# Altium PCB PCB1.PcbDoc
Units mm, origin at the board's own origin, x right, y up, seen from the top; angles counter-clockwise.
Board outline 366.78 x 253.36 mm, 2 copper layers (Top Layer, Bottom Layer); 82 components, 38 nets, 184 pads, 0 vias.
Unrouted connection lines stored in the file: 34.
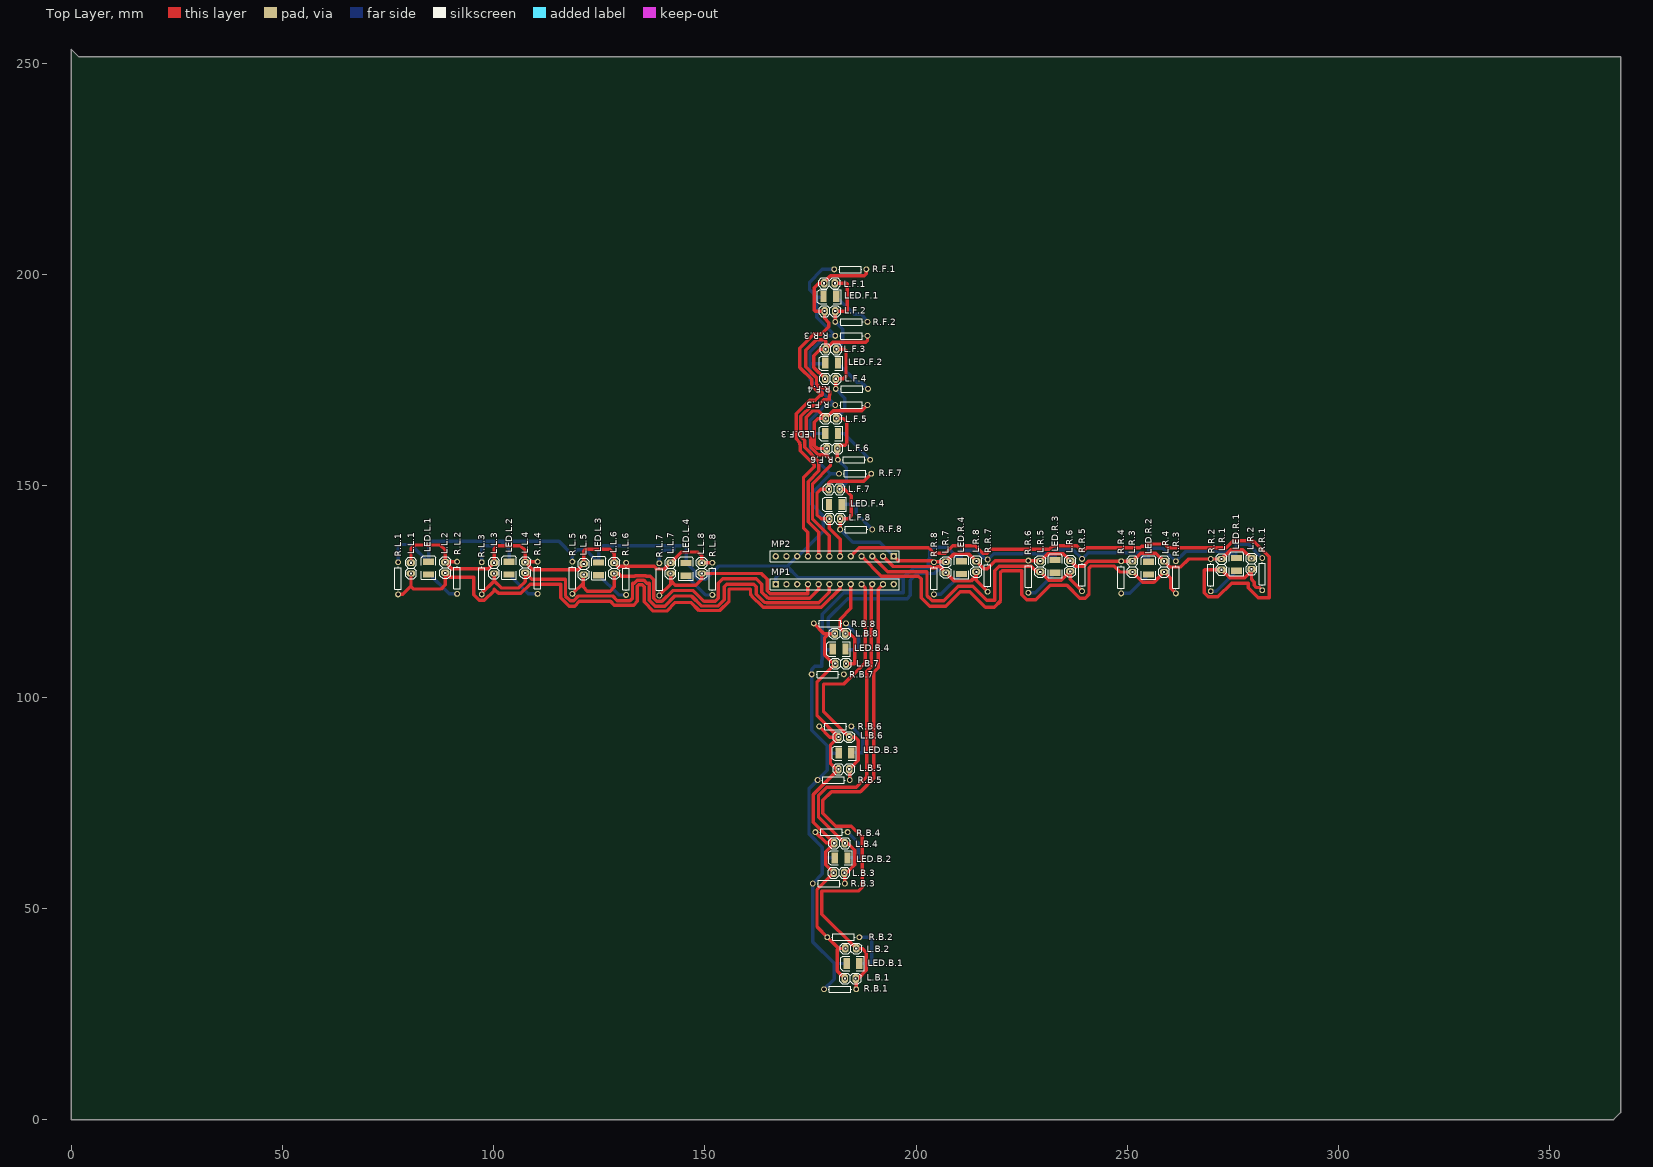
[diagram p0: Top Layer view]
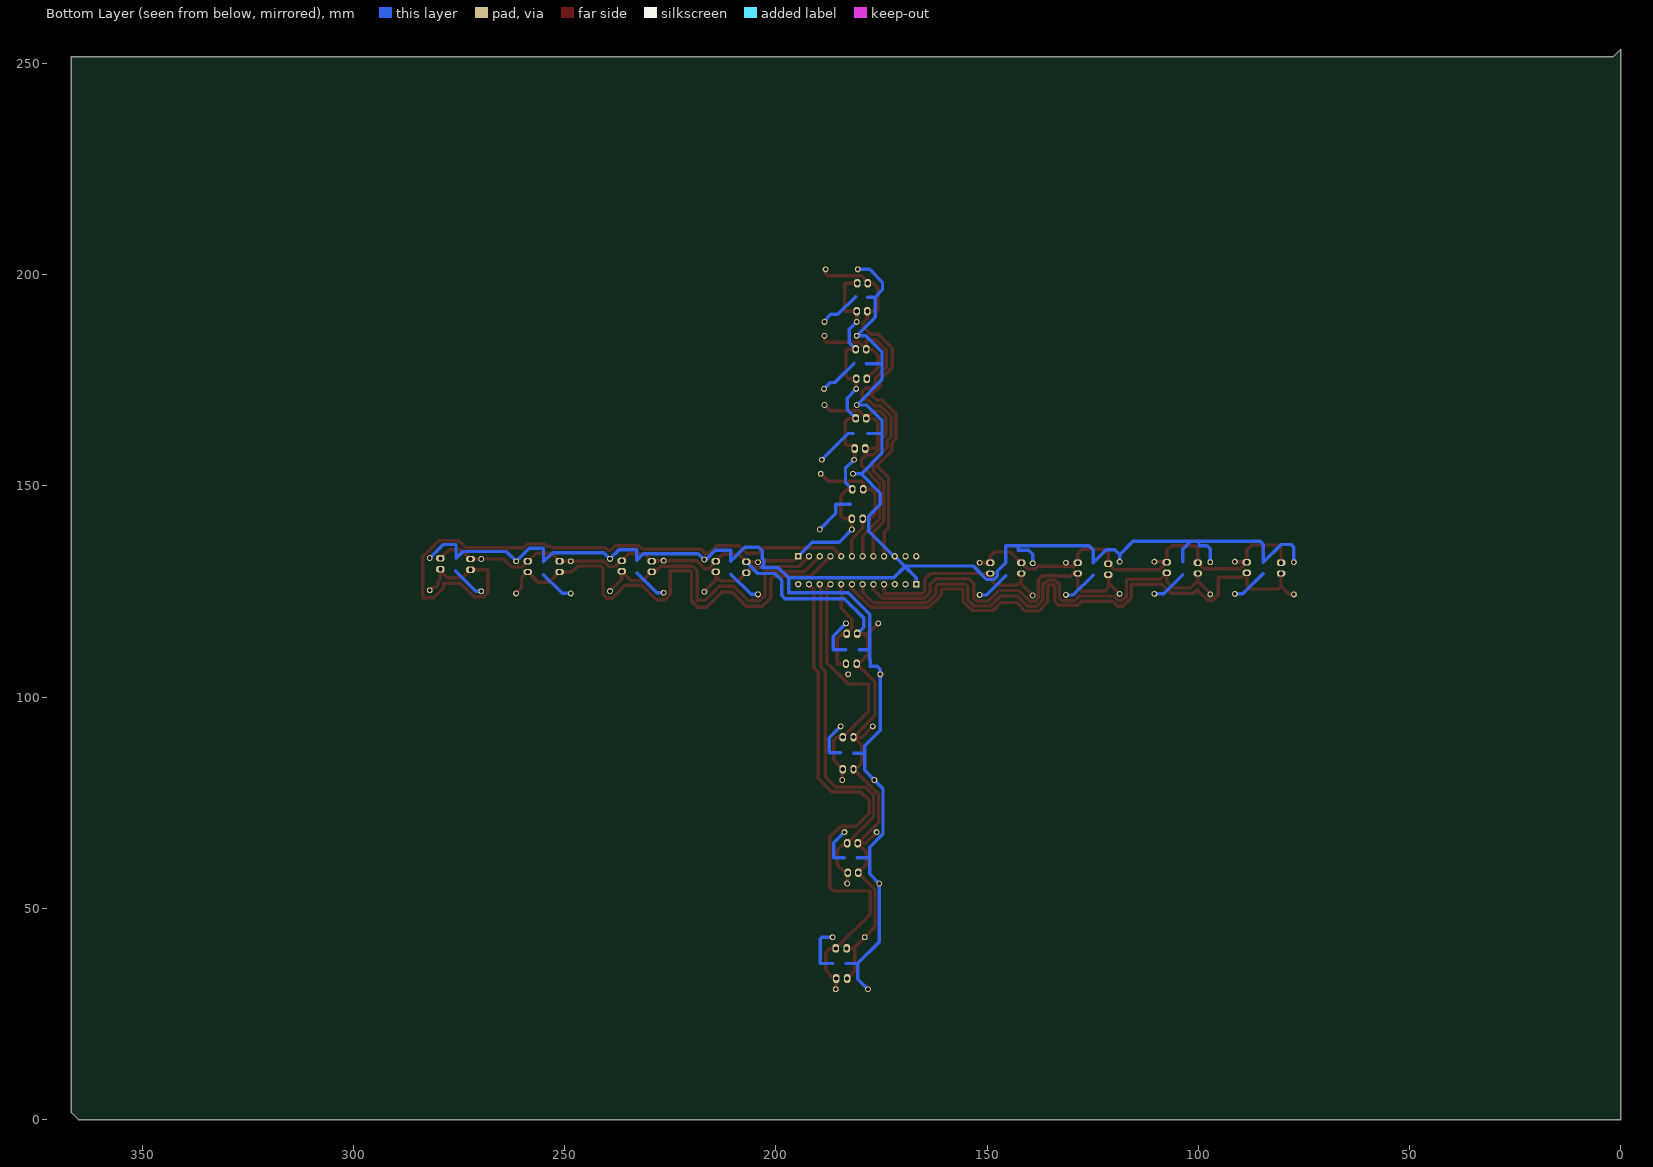
[diagram p1: Bottom Layer view, seen from below]
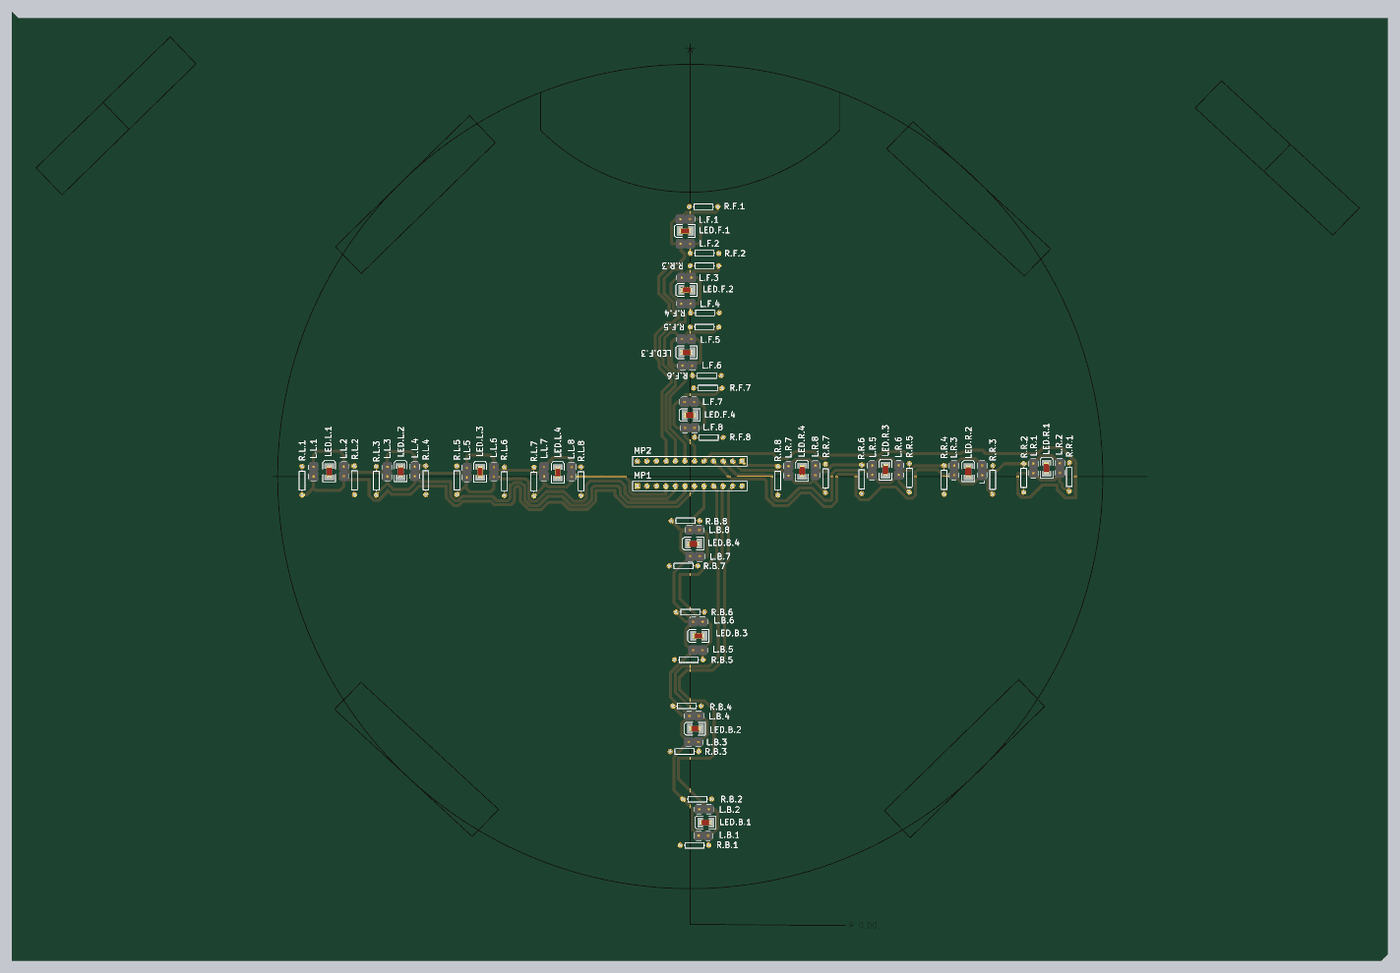
[diagram p2: 3D render of the assembled board from above, using the file's embedded part models]

## Layer stack, top to bottom
Top Solder: solder mask 0.0102, Solder Resist, Dk 3.5
Top Layer: signal copper 0.0356
Dielectric 1: dielectric 0.32, FR-4, Dk 4.8
Bottom Layer: signal copper 0.0356
Bottom Solder: solder mask 0.0102, Solder Resist, Dk 3.5

## Board outline
0,0 365.125,0 366.776,1.651 366.776,251.587 1.778,251.587 0,253.365

## Design rules (kind name [scope] priority, off if disabled: settings)
Clearance Clearance_2 [All] p1: gap=0.254 ignorepadtopadclearanceinfootprint=FALSE except(0: Arc-Hole Track-Hole SMDPad-Hole THPad-Hole Via-Hole Fill-Hole Poly-Hole Region-Hole Text-Hole)
Clearance Clearance_1 [All] p2: gap=0.254 ignorepadtopadclearanceinfootprint=FALSE except(0: Arc-Hole Track-Hole SMDPad-Hole THPad-Hole Via-Hole Fill-Hole Poly-Hole Region-Hole Text-Hole)
Clearance [All] p3: gap=0.254 ignorepadtopadclearanceinfootprint=FALSE except(0: Arc-Hole Track-Hole SMDPad-Hole THPad-Hole Via-Hole Fill-Hole Poly-Hole Region-Hole Text-Hole)
PolygonConnect [All] p1: connectstyle=Relief reliefconductorwidth=0.254 reliefentries=4 polygonreliefangle="90 Angle" airgapwidth=0.254
RoutingVias [All] p1: holewidth=0.711 width=1.27 viastyle="Through Hole" minholewidth=0.711 minwidth=1.27 maxholewidth=0.711 maxwidth=1.27
SolderMaskExpansion [All] p1: expansion=0.102
Width Width_1 [All] p1: maxlimit=1 minlimit=0.8 preferedwidth=0.8 minimp=50.000000 maximp=50.000000 favimp=50.000000
30 further rules are at their usual default settings.

## Components (designator, comment, footprint, x,y, rotation, side; value= is the part's Value field where it differs from the comment)
L.B.1 "Header 2" My_1X02 183.134,33.401 r180 top
L.B.2 "Header 2" My_1X02 185.801,40.513 r0 top
L.B.3 "Header 2" My_1X02 180.467,58.42 r180 top
L.B.4 "Header 2" My_1X02 183.134,65.405 r0 top
L.B.5 "Header 2" My_1X02 181.61,82.931 r180 top
L.B.6 "Header 2" My_1X02 184.15,90.551 r0 top
L.B.7 "Header 2" My_1X02 180.848,107.95 r180 top
L.B.8 "Header 2" My_1X02 183.261,115.062 r0 top
L.F.1 "Header 2" My_1X02 180.745,197.993 r0 top
L.F.2 "Header 2" My_1X02 178.308,191.389 r180 top
L.F.3 "Header 2" My_1X02 181.102,182.372 r0 top
L.F.4 "Header 2" My_1X02 178.435,175.387 r180 top
L.F.5 "Header 2" My_1X02 181.102,165.989 r0 top
L.F.6 "Header 2" My_1X02 178.816,158.877 r180 top
L.F.7 "Header 2" My_1X02 181.864,149.225 r0 top
L.F.8 "Header 2" My_1X02 179.451,142.24 r180 top
L.L.1 "Header 2" My_1X02 80.391,131.826 r90 top
L.L.2 "Header 2" My_1X02 88.519,129.413 r270 top
L.L.3 "Header 2" My_1X02 100.076,131.826 r90 top
L.L.4 "Header 2" My_1X02 107.442,129.413 r270 top
L.L.5 "Header 2" My_1X02 121.285,131.572 r90 top
L.L.6 "Header 2" My_1X02 128.524,129.286 r270 top
L.L.7 "Header 2" My_1X02 141.859,131.826 r90 top
L.L.8 "Header 2" My_1X02 149.225,129.286 r270 top
L.R.1 "Header 2" My_1X02 272.288,132.715 r90 top
L.R.2 "Header 2" My_1X02 279.4,130.302 r270 top
L.R.3 "Header 2" My_1X02 251.206,132.183 r90 top
L.R.4 "Header 2" My_1X02 258.699,129.643 r270 top
L.R.5 "Header 2" My_1X02 229.362,132.207 r90 top
L.R.6 "Header 2" My_1X02 236.474,129.77 r270 top
L.R.7 "Header 2" My_1X02 207.01,132.032 r90 top
L.R.8 "Header 2" My_1X02 214.249,129.667 r270 top
LED.B.1 "LED SMD" MY_LED_SMD 185.039,36.957 r180 top
LED.B.2 "LED SMD" MY_LED_SMD 182.245,61.976 r180 top
LED.B.3 "LED SMD" MY_LED_SMD 183.134,86.741 r180 top
LED.B.4 "LED SMD" MY_LED_SMD 181.761,111.379 r180 top
LED.F.1 "LED SMD" MY_LED_SMD 179.578,194.818 r180 top
LED.F.2 "LED SMD" MY_LED_SMD 179.983,179.07 r180 top
LED.F.3 "LED SMD" MY_LED_SMD 179.983,162.433 r180 top
LED.F.4 "LED SMD" MY_LED_SMD 180.848,145.669 r180 top
LED.L.1 "LED SMD" MY_LED_SMD 84.582,130.532 r90 top
LED.L.2 "LED SMD" MY_LED_SMD 103.632,130.556 r90 top
LED.L.3 "LED SMD" MY_LED_SMD 124.841,130.405 r90 top
LED.L.4 "LED SMD" MY_LED_SMD 145.542,130.278 r90 top
LED.R.1 "LED SMD" MY_LED_SMD 275.844,131.445 r90 top
LED.R.2 "LED SMD" MY_LED_SMD 255.016,130.556 r90 top
LED.R.3 "LED SMD" MY_LED_SMD 232.918,130.961 r90 top
LED.R.4 "LED SMD" MY_LED_SMD 210.693,130.659 r90 top
MP1 "Header 12" HDR1X12 166.751,126.746 r0 top
MP2 "Header 12" HDR1X12 194.691,133.35 r180 top
R.B.1 "Res1" AXIAL-0.3 181.991,30.861 r0 top value=1K
R.B.2 "Res2" AXIAL-0.3 182.753,43.18 r0 top value=1K
R.B.3 "Res3" AXIAL-0.3 179.324,55.88 r0 top value=1K
R.B.4 "Res4" AXIAL-0.3 179.959,68.072 r0 top value=1K
R.B.5 "Res5" AXIAL-0.3 180.467,80.391 r0 top value=1K
R.B.6 "Res6" AXIAL-0.3 180.848,93.091 r0 top value=1K
R.B.7 "Res7" AXIAL-0.3 179.07,105.41 r0 top value=1K
R.B.8 "Res8" AXIAL-0.3 179.578,117.475 r0 top value=1K
R.F.1 "Res1" AXIAL-0.3 184.404,201.295 r0 top value=1K
R.F.2 "Res2" AXIAL-0.3 184.658,188.849 r0 top value=1K
R.F.4 "Res4" AXIAL-0.3 184.785,172.974 r0 top value=1K
R.F.5 "Res5" AXIAL-0.3 184.658,169.164 r0 top value=1K
R.F.6 "Res6" AXIAL-0.3 185.293,156.21 r0 top value=1K
R.F.7 "Res7" AXIAL-0.3 185.547,152.908 r0 top value=1K
R.F.8 "Res8" AXIAL-0.3 185.801,139.7 r0 top value=1K
R.L.1 "Res1" AXIAL-0.3 77.343,128.143 r270 top value=1K
R.L.2 "Res2" AXIAL-0.3 91.313,128.27 r270 top value=1K
R.L.3 "Res3" AXIAL-0.3 97.155,128.143 r270 top value=1K
R.L.4 "Res4" AXIAL-0.3 110.363,128.27 r270 top value=1K
R.L.5 "Res5" AXIAL-0.3 118.618,128.27 r270 top value=1K
R.L.6 "Res6" AXIAL-0.3 131.318,128.016 r270 top value=1K
R.L.7 "Res7" AXIAL-0.3 139.192,127.889 r270 top value=1K
R.L.8 "Res8" AXIAL-0.3 151.765,128.016 r270 top value=1K
R.R.1 "Res1" AXIAL-0.3 281.94,129.135 r270 top value=1K
R.R.2 "Res2" AXIAL-0.3 269.748,128.905 r270 top value=1K
R.R.3 "Res3" AXIAL-0.3 184.658,185.547 r0 top value=1K
R.R.3 "Res3" AXIAL-0.3 261.493,128.373 r270 top value=1K
R.R.4 "Res4" AXIAL-0.3 248.539,128.373 r270 top value=1K
R.R.5 "Res5" AXIAL-0.3 239.268,128.929 r270 top value=1K
R.R.6 "Res6" AXIAL-0.3 226.568,128.524 r270 top value=1K
R.R.7 "Res7" AXIAL-0.3 216.916,128.778 r270 top value=1K
R.R.8 "Res8" AXIAL-0.3 204.216,128.143 r270 top value=1K

## Footprints (in the part's own frame and the unit in brackets; to place one, negate y for a bottom-side part, rotate by r counter-clockwise, add the part's x,y. Pads: shape width x height; smd on the part's side, far side on the other; paste and mask are expansions set on the pad)
AXIAL-0.3 [mm] "Axial Device, Thru-Hole; 2 Leads; 0.3 in Pin Spacing"
  round 1.4 hole 0.85: 1(-3.81,0) 2(3.81,0)
  silkscreen extent -2.77,-0.76 2.77,0.76
HDR1X12 [mm] "Connector; Header; 12 Position"
  rect 1.5x1.5 hole 0.9: 1(0,0)
  round 1.5 hole 0.9: 2(2.54,0) 3(5.08,0) 4(7.62,0) 5(10.16,0) 6(12.7,0) 7(15.24,0) 8(17.78,0) 9(20.32,0) 10(22.86,0) 11(25.4,0) 12(27.94,0)
  silkscreen extent -1.27,-1.27 29.21,1.27
My_1X02 [mil]
  oct 60x80 hole 40: 1(-100,0) 2(0,0)
  silkscreen extent -150,-50 50,50, body extent -149,-51 51,49, height 234
MY_LED_SMD [mm]
  rect 1.5x2.6 smd: 1(-1.5,0) 2(1.5,0)
  silkscreen extent -2.65,-1.7 2.95,1.7, body extent -1.51,-0.8 1.71,0.8, height 1.1

## Part data
L.B.1 L.B.2 L.B.3 L.B.4 L.B.5 L.B.6 L.B.7 L.B.8 L.F.1 L.F.2 L.F.3 L.F.4 L.F.5 L.F.6 L.F.7 L.F.8 L.L.1 L.L.2 L.L.3 L.L.4 L.L.5 L.L.6 L.L.7 L.L.8 L.R.1 L.R.2 L.R.3 L.R.4 L.R.5 L.R.6 L.R.7 L.R.8: "Header, 2-Pin", LatestRevisionDate=17-Jul-2002, LatestRevisionNote="Re-released for DXP Platform.", Publisher="Altium Limited"
MP1 MP2: "Header, 12-Pin", LatestRevisionDate=17-Jul-2002, LatestRevisionNote="Re-released for DXP Platform.", Publisher="Altium Limited"
R.B.1 R.F.1 R.L.1 R.R.1: "Resistor", LatestRevisionDate=17-Jul-2002, LatestRevisionNote="Re-released for DXP Platform.", PackageDescription="Axial Device, Thru-Hole; 2 Leads; 0.3 in Pin Spacing", PackageReference=AXIAL-0.3, Published=8-Jun-2000, Publisher="Altium Limited"
R.B.2 R.B.3 R.B.4 R.B.5 R.B.6 R.B.7 R.B.8 R.F.2 R.F.4 R.F.5 R.F.6 R.F.7 R.F.8 R.L.2 R.L.3 R.L.4 R.L.5 R.L.6 R.L.7 R.L.8 R.R.2 R.R.3 R.R.3 R.R.4 R.R.5 R.R.6 R.R.7 R.R.8: library part Res1, "Resistor", LatestRevisionDate=17-Jul-2002, LatestRevisionNote="Re-released for DXP Platform.", PackageDescription="Axial Device, Thru-Hole; 2 Leads; 0.3 in Pin Spacing", PackageReference=AXIAL-0.3, Published=8-Jun-2000, Publisher="Altium Limited"

## Nets (pads, with @x,y where several pads share a name; then routed paths per layer and width w, separated by ;. In a path a pad name is that pad's centre, name@x,y a point inside that pad or via, vN(x,y) a via of type N, cw(c..) or ccw(c..) an arc to the next point about the centre after c; other vN are vias at no path point)
A0: MP1.3
A1: MP1.2
A2: MP2.11
A3: MP2.12
GND: LED.B.1.2 LED.B.2.2 LED.B.3.2 LED.B.4.2 LED.F.1.2 LED.F.2.2 LED.F.3.2 LED.F.4.2 LED.L.1.2 LED.L.2.2 LED.L.3.2 LED.L.4.2 LED.R.1.2 LED.R.2.2 LED.R.3.2 LED.R.4.2 MP1.1 MP2.10 R.B.1.1 R.B.3.1 R.B.5.1 R.B.7.1 R.F.1.1 R.F.5.1 R.F.7.1 R.L.1.1 R.L.3.1 R.L.5.1 R.L.7.1 R.R.1.1 R.R.3.1 R.R.5.1 R.R.7.1 | length 525.5
  Bottom Layer w0.254: 177.546,201.041 177.8,201.295
  Bottom Layer w0.8: R.L.1.1 77.343,135.509 77.978,136.144 80.391,136.144 84.582,131.953 84.582,136.144 85.344,136.906 99.822,136.906 ; R.L.3.1 97.155,135.128 97.917,135.89 99.822,135.89 99.822,136.906 ; 103.632,132.032 103.632,135.001 101.727,136.906 ; R.L.5.1 118.618,133.731 ; R.L.7.1 139.192,133.858 140.081,134.747 142.621,134.747 142.621,135.763 ; MP1.1 166.751,128.27 169.418,130.937 ; 174.752,197.993 174.752,196.436 176.497,194.691 178.205,194.691 ; 174.752,198.247 177.546,201.041 ; 176.497,194.658 176.497,189.898 180.848,185.547 178.689,185.547 174.879,181.737 174.879,179.197 ; 177.673,108.712 177.673,107.315 176.022,107.315 175.26,106.553 R.B.7.1 175.26,92.202 178.943,88.519 178.943,86.741 ; 177.8,108.839 177.8,113.665 177.8,114.681 177.8,119.634 182.88,124.714 196.977,124.714 196.977,128.27 ; 177.8,111.252 180.213,111.252 ; 177.8,201.295 R.F.1.1 ; R.B.1.1 180.594,33.274 180.594,36.957 ; 178.308,162.433 174.879,162.433 ; 178.562,178.943 175.133,178.943 174.879,179.197 ; 179.705,152.908 174.879,157.734 174.879,162.433 ; 180.721,61.976 177.8,61.976 ; 181.61,86.741 178.943,86.741 ; R.F.7.1 179.832,152.908 175.26,148.336 175.26,145.669 178.035,142.894 178.035,139.3 172.085,133.35 MP2.10 169.545,131.064 ; 183.515,36.957 180.594,36.957 ; R.R.1.1 278.741,136.144 275.717,136.144 275.717,132.842 274.066,134.493 263.803,134.493 261.493,132.183 258.421,135.255 255.016,135.255 255.016,132.032 252.809,134.239 240.768,134.239 R.R.5.1 237.133,134.874 232.918,134.874 232.918,132.461 231.394,133.985 218.313,133.985 R.R.7.1 216.535,132.588 214.376,134.747 210.693,134.747 210.693,132.183 207.367,135.509 204.089,135.509 203.2,134.62 203.2,132.852 202.862,132.514 202.862,131.392 203.2,131.054 203.2,130.683 199.39,130.683 196.977,128.27 ; 99.822,136.906 101.727,136.906 ; 101.727,136.906 115.443,136.906 118.618,133.731 ; 118.618,133.731 119.761,134.874 121.793,134.874 124.841,131.826 124.841,134.874 125.857,135.89 145.542,135.89 145.542,131.826 147.555,129.813 147.555,128.634 148.319,127.87 150.131,127.87 153.325,131.064 169.545,131.064 ; 169.418,130.937 169.545,131.064 ; 169.418,130.937 172.085,128.27 196.977,128.27 ; 174.879,162.433 174.879,165.608 178.435,169.164 R.F.5.1 174.879,175.133 174.879,179.197 ; 177.8,61.976 177.8,64.506 174.625,67.681 174.625,78.359 R.B.5.1 178.943,82.677 178.943,86.741 ; 177.8,61.976 177.8,58.166 R.B.3.1 175.514,42.037 180.594,36.957
NetLED.B.1_1: LED.B.1.1 R.B.2.2 | length 11.8
  Bottom Layer w0.8: 186.563,36.957 189.484,36.957 189.484,42.799 189.103,43.18 R.B.2.2
NetLED.B.2_1: LED.B.2.1 R.B.4.2 | length 9.7
  Bottom Layer w0.8: 183.769,61.976 186.309,61.976 186.309,65.532 R.B.4.2
NetLED.B.3_1: LED.B.3.1 R.B.6.2 | length 9.9
  Bottom Layer w0.8: R.B.6.2 187.325,90.424 187.325,86.868 184.785,86.868
NetLED.B.4_1: LED.B.4.1 R.B.8.2 | length 10.5
  Bottom Layer w0.8: 183.388,111.252 186.436,111.252 186.436,114.427 R.B.8.2
NetLED.F.1_1: LED.F.1.1 R.F.2.2 | length 9.7
  Bottom Layer w0.8: 181.102,194.818 185.293,190.627 186.944,190.627 R.F.2.2@188.468,189.103
NetLED.F.2_1: LED.F.2.1 R.F.4.2 | length 9.6
  Bottom Layer w0.8: 181.483,179.07 186.055,174.498 187.071,174.498 R.F.4.2
NetLED.F.3_1: LED.F.3.1 R.F.6.2 | length 10.1
  Bottom Layer w0.8: 181.61,162.433 182.88,162.433 R.F.6.2
NetLED.F.4_1: LED.F.4.1 R.F.8.2 | length 11
  Bottom Layer w0.8: 182.372,145.669 185.801,145.669 185.801,143.51 R.F.8.2
NetLED.L.1_1: LED.L.1.1 R.L.2.2 | length 8.7
  Bottom Layer w0.8: 84.582,129.286 89.408,124.46 R.L.2.2
NetLED.L.2_1: LED.L.2.1 R.L.4.2 | length 8.6
  Bottom Layer w0.8: 103.632,129.032 108.204,124.46 R.L.4.2
NetLED.L.3_1: LED.L.3.1 R.L.6.2 | length 8.4
  Bottom Layer w0.8: 124.841,128.905 129.54,124.206 R.L.6.2
NetLED.L.4_1: LED.L.4.1 R.L.8.2 | length 8.1
  Bottom Layer w0.8: 145.542,128.778 150.114,124.206 R.L.8.2
NetLED.R.1_1: LED.R.1.1 R.R.2.2 | length 8.1
  Bottom Layer w0.8: R.R.2.2 271.018,125.095 275.844,129.921
NetLED.R.2_1: LED.R.2.1 R.R.4.2 | length 8.3
  Bottom Layer w0.8: R.R.4.2 250.547,124.563 251.206,125.222 255.016,129.032
NetLED.R.3_1: LED.R.3.1 R.R.6.2 | length 8.3
  Bottom Layer w0.8: R.R.6.2 228.219,124.714 232.918,129.413
NetLED.R.4_1: LED.R.4.1 R.R.8.2 | length 8.5
  Bottom Layer w0.8: R.R.8.2 205.867,124.333 210.693,129.159
P0: L.L.7.1 L.L.8.2 MP1.4 R.L.7.2 | length 49.3
  Top Layer w0.254: 169.418,124.484 169.442,124.46 ; MP1.4@174.498,126.238 MP1.4@174.498,126.746
  Top Layer w0.8: R.L.7.2 141.859,126.746 141.859,127.635 ; MP1.4 174.371,126.238 174.371,124.46 169.442,124.46 165.481,124.46 164.719,125.222 164.719,127.889 163.322,129.286 L.L.8.2 149.225,127.889 147.828,126.492 144.653,126.492 143.002,126.492 141.859,127.635 ; 141.859,127.635 L.L.7.1 141.859,127.635
P1: L.L.5.1 L.L.6.2 MP1.5 R.L.5.2 | length 83.1
  Top Layer w0.254: 142.391,125.246 142.597,125.246
  Top Layer w0.8: R.L.5.2 121.158,127 ; L.L.5.1@121.158,128.905 121.158,127 ; 142.391,125.246 139.827,122.682 138.557,122.682 137.833,123.406 137.833,127.851 137.033,128.651 136.077,128.651 136.001,128.727 133.493,128.727 133.417,128.651 130.175,128.651 129.54,129.286 L.L.6.2 128.524,126.111 127.532,125.119 122.15,125.119 121.158,126.111 121.158,127 ; 142.597,125.246 147.193,125.246 149.757,122.682 152.4,122.682 153.162,123.444 153.162,127 154.178,128.016 162.179,128.016 163.449,126.746 163.449,124.841 164.808,123.482 164.968,123.482 165.044,123.406 174.808,123.406 176.911,125.509 MP1.5
P2: L.L.3.1 L.L.4.2 MP1.6 R.L.3.2 | length 115.6
  Top Layer w0.254: R.L.3.2 R.L.3.2@97.155,124.587
  Top Layer w0.8: R.L.3.2@97.155,124.587 100.076,127.508 ; L.L.3.1 100.076,127.508 ; MP1.6 179.451,124.841 176.962,122.352 164.608,122.352 164.532,122.428 164.084,122.428 162.179,124.333 162.179,126.111 161.544,126.746 155.194,126.746 154.559,126.111 154.559,123.063 153.073,121.577 149.187,121.577 146.812,123.952 142.875,123.952 140.462,121.539 138.176,121.539 136.779,122.936 136.779,127 136.238,127 135.565,127.673 133.929,127.673 133.256,127 132.842,127 132.842,123.444 132.25,122.852 129.243,122.852 128.143,123.952 120.048,123.952 118.905,122.809 118.11,122.809 116.967,123.952 116.967,127.889 108.966,127.889 L.L.4.2 107.442,127.381 105.918,125.857 101.727,125.857 100.076,127.508
P3: L.L.1.1 L.L.2.2 MP1.7 R.L.1.2 | length 144.3
  Top Layer w0.8: R.L.1.2 78.486,124.333 80.391,126.238 ; L.L.1.1 80.391,126.238 ; MP1.7 181.991,125.73 177.546,121.285 163.83,121.285 163.741,121.374 163.647,121.374 161.125,123.896 161.125,123.99 160.782,124.333 160.782,125.603 155.702,125.603 155.702,122.682 153.543,120.523 148.59,120.523 146.685,122.428 143.002,122.428 140.97,120.396 137.795,120.396 135.636,122.555 135.636,126.111 135.128,126.619 134.366,126.619 133.985,126.238 133.985,122.682 133.096,121.793 128.524,121.793 127.635,122.682 120.269,122.682 119.126,121.539 117.856,121.539 115.824,123.571 115.824,126.746 108.585,126.746 106.402,124.563 101.116,124.563 100.076,125.603 100.076,125.222 97.79,122.936 96.52,122.936 95.25,124.206 95.25,128.397 89.535,128.397 L.L.2.2 88.519,126.619 87.503,125.603 81.026,125.603 80.391,126.238
P4: L.B.7.1 L.B.8.2 MP1.8 R.B.7.2 | length 23.9
  Top Layer w0.8: L.B.7.1 185.42,107.95 185.42,113.919 184.277,115.062 L.B.8.2 181.991,116.332 181.991,117.475 181.991,118.491 184.531,121.031 MP1.8
P5: L.B.5.1 L.B.6.2 MP1.9 R.B.5.2 | length 58.7
  Top Layer w0.8: L.B.5.1 186.309,85.09 186.309,89.789 185.547,90.551 L.B.6.2 178.054,96.647 178.054,103.124 182.88,103.124 187.96,108.204 187.96,125.857 MP1.9 ; R.B.5.2 L.B.5.1@184.277,82.804
P6: L.B.3.1 L.B.4.2 MP1.10 R.B.3.2 | length 84.7
  Top Layer w0.254: L.B.3.1 L.B.3.1@183.515,58.42 ; MP1.10@189.357,126.492 MP1.10
  Top Layer w0.8: R.B.3.2 L.B.3.1@183.134,58.293 ; L.B.4.2 176.873,71.666 176.873,76.67 178.854,78.651 185.839,78.651 188.341,81.153 188.341,106.172 189.357,107.188 MP1.10@189.357,126.492 ; L.B.3.1@183.515,58.42 185.42,60.325 185.42,63.754 L.B.4.2@183.769,65.405
P7: L.B.1.1 L.B.2.2 MP1.11 R.B.1.2 | length 127.2
  Top Layer w0.254: L.B.1.1 185.801,33.401 L.B.1.1@186.309,33.401
  Top Layer w0.8: R.B.1.2@185.801,31.115 L.B.1.1@185.801,33.401 ; L.B.1.1@186.309,33.401 188.214,35.306 188.214,39.497 187.198,40.513 L.B.2.2 177.673,48.641 177.673,54.102 186.309,54.102 187.198,54.991 187.198,66.929 184.658,69.469 180.975,69.469 177.927,72.517 177.927,75.565 179.959,77.597 186.817,77.597 189.992,80.772 189.992,105.918 191.008,106.934 191.008,125.603 MP1.11
P8: L.R.7.1 L.R.8.2 MP2.2 R.R.7.2 | length 31.1
  Top Layer w0.8: MP2.2 194.564,130.937 203.317,130.937 203.655,130.599 204.777,130.599 205.115,130.937 205.565,130.937 L.R.7.1 208.994,127.508 212.979,127.508 214.249,128.778 ; L.R.8.2 214.249,128.778 ; R.R.7.2 214.249,127.635 214.249,128.778
P9: L.R.5.1 L.R.6.2 MP2.3 R.R.5.2 | length 72.7
  Top Layer w0.8: MP2.3 193.256,129.705 200.787,129.705 ; 200.825,129.667 202.565,129.667 202.565,124.069 203.787,122.847 203.924,122.847 203.962,122.809 206.502,122.809 209.931,126.238 213.36,126.238 216.662,122.936 218.567,122.936 218.567,129.921 219.621,130.975 227.292,130.975 228.6,129.667 L.R.5.1 231.394,127.635 234.339,127.635 L.R.6.2 236.474,127.913 R.R.5.2
P10: L.R.3.1 L.R.4.2 MP2.4 R.R.3.2@261.493,124.563 | length 114.1
  Top Layer w0.8: MP2.4 191.77,128.651 200.533,128.651 201.168,128.016 201.168,123.571 203.2,121.539 207.01,121.539 210.439,124.968 212.725,124.968 216.408,121.285 218.478,121.285 219.964,122.771 219.964,129.54 220.345,129.921 225.02,129.921 225.02,124.23 226.187,123.063 228.346,123.063 231.775,126.492 235.712,126.492 238.76,123.444 240.03,123.444 240.919,124.333 240.919,130.556 241.427,131.064 246.761,131.064 248.182,129.643 L.R.3.1 253.595,127.254 256.31,127.254 L.R.4.2 260.223,128.119 260.223,125.833 R.R.3.2@261.493,124.563
P11: L.R.1.1 L.R.2.2 MP2.5 R.R.1.2 | length 159.7
  Top Layer w0.8: MP2.5 186.563,135.382 202.946,135.382 204.216,134.112 206.883,134.112 208.661,135.89 213.995,135.89 215.773,134.112 216.789,134.112 217.678,135.001 231.521,135.001 232.41,135.89 237.998,135.89 239.141,134.747 239.776,134.747 240.411,135.382 252.984,135.382 253.365,135.763 254.254,135.763 254.762,136.271 258.826,136.271 259.715,135.382 273.431,135.382 275.082,137.033 279.805,137.033 283.591,133.247 283.591,123.571 280.967,123.571 278.638,125.9 278.638,127 274.701,127 271.442,123.741 269.187,123.741 268.224,124.704 268.224,130.048 268.351,130.175 L.R.1.1 274.193,128.27 277.797,128.27 L.R.2.2@279.4,129.873 ; L.R.2.2 L.R.2.2@279.4,129.873 ; R.R.1.2 281.305,125.96 280.567,125.96 280.035,126.492 280.035,127.23 279.4,127.865 L.R.2.2@279.4,129.873
P12: L.F.7.1 L.F.8.2 MP2.6 R.F.7.2 | length 34
  Top Layer w0.8: MP2.6 181.991,137.414 179.451,139.954 L.F.8.2 177.488,142.24 176.517,143.211 176.517,148.323 177.419,149.225 L.F.7.1 179.324,150.749 179.705,151.13 187.579,151.13 R.F.7.2
P13: L.F.5.1 L.F.6.2 MP2.7 R.F.5.2 | length 68.7
  Top Layer w0.8: L.F.6.2 176.53,158.877 175.895,159.512 175.895,165.1 176.784,165.989 L.F.5.1 ; MP2.7 179.451,138.176 175.463,142.164 175.463,150.58 179.705,154.822 179.705,156.337 178.651,157.391 176.84,157.391 175.006,159.225 175.006,161.163 173.99,162.179 173.99,166.243 175.514,167.767 176.784,167.767 L.F.5.1 ; R.F.5.2 187.114,167.81 180.383,167.81 L.F.5.1
P14: L.F.3.1 L.F.4.2 MP2.8 R.R.3.2@188.468,185.547 | length 89.9
  Top Layer w0.8: MP2.8 176.911,139.065 174.409,141.567 174.409,151.017 176.949,153.557 176.949,155.791 173.609,159.131 173.609,160.782 172.72,161.671 172.72,166.497 175.26,169.037 176.681,169.037 178.078,170.434 179.451,170.434 179.578,172.339 178.816,173.101 178.275,173.101 178.11,173.266 177.221,173.266 176.403,174.084 176.403,175.641 173.863,178.181 173.863,182.118 176.403,184.658 178.181,184.658 178.562,184.277 L.F.3.1 ; L.F.4.2 175.768,178.054 175.768,180.848 177.292,182.372 L.F.3.1 ; R.R.3.2@188.468,185.547 188.468,184.404 188.106,184.042 180.232,184.042 L.F.3.1
P15: L.F.1.1 L.F.2.2 MP2.9 R.F.1.2 | length 94.4
  Top Layer w0.8: MP2.9 174.371,139.065 173.317,140.119 173.317,151.981 175.895,154.559 175.895,155.067 172.593,158.369 172.593,158.656 172.555,158.694 172.555,159.804 172.466,159.893 172.466,160.274 171.577,161.163 171.577,167.132 174.752,170.307 176.149,170.307 177.292,171.45 177.673,171.45 177.8,171.577 177.8,172.085 177.673,172.212 176.784,172.212 175.26,173.736 175.26,175.26 172.466,178.054 172.466,182.626 175.768,185.928 177.546,185.928 179.348,187.73 179.348,188.698 178.308,189.738 L.F.2.2 176.149,191.389 175.895,191.643 175.895,196.977 176.911,197.993 L.F.1.1 ; L.F.1.1@178.205,198.271 179.705,199.771 187.706,199.771 188.214,200.279 R.F.1.2
VCC: L.B.1.2 L.B.2.1 L.B.3.2 L.B.4.1 L.B.5.2 L.B.6.1 L.B.7.2 L.B.8.1 L.F.1.2 L.F.2.1 L.F.3.2 L.F.4.1 L.F.5.2 L.F.6.1 L.F.7.2 L.F.8.1 L.L.1.2 L.L.2.1 L.L.3.2 L.L.4.1 L.L.5.2 L.L.6.1 L.L.7.2 L.L.8.1 L.R.1.2 L.R.2.1 L.R.3.2 L.R.4.1 L.R.5.2 L.R.6.1 L.R.7.2 L.R.8.1 MP2.1 R.B.2.1 R.B.4.1 R.B.6.1 R.B.8.1 R.F.2.1 R.F.4.1 R.F.6.1 R.F.8.1 R.L.2.1 R.L.4.1 R.L.6.1 R.L.8.1 R.R.2.1 R.R.4.1 R.R.6.1 R.R.8.1 | length 452.1
  Top Layer w0.8: L.L.1.2 80.391,135.128 81.28,136.017 87.376,136.017 88.519,134.874 L.L.2.1 90.043,130.429 98.679,130.429 L.L.3.2 100.076,135.128 100.838,135.89 106.299,135.89 107.442,134.747 L.L.4.1 109.22,130.175 119.888,130.175 L.L.5.2 121.285,134.62 121.666,135.001 127.508,135.001 128.524,133.985 L.L.6.1 129.623,130.727 129.852,130.956 138.02,130.956 138.631,130.345 140.378,130.345 L.L.7.2 144.399,134.366 148.336,134.366 149.225,133.477 L.L.8.1 R.L.8.1 ; L.L.2.1@88.646,132.08 R.L.2.1 ; L.L.4.1@107.569,132.08 R.L.4.1 ; L.L.6.1@128.778,131.826 L.L.6.1@129.032,131.826 ; R.B.8.1 178.181,115.062 179.324,115.062 ; R.B.4.1 178.689,65.532 L.B.4.1@180.467,65.532 ; R.B.6.1 179.578,90.551 L.B.6.1 ; L.B.8.1 179.324,115.062 ; L.F.1.2 183.515,197.993 183.642,197.866 183.642,191.516 183.515,191.389 L.F.2.1 R.F.2.1 ; R.F.4.1 L.F.4.1 182.753,175.387 183.388,176.022 183.388,181.991 183.007,182.372 L.F.3.2 ; L.B.5.2@181.102,82.931 179.705,84.328 179.705,88.646 L.B.6.1 ; L.F.5.2 182.753,165.989 183.547,165.195 183.547,159.925 183.229,159.607 182.086,159.607 L.F.6.1 R.F.6.1@181.356,156.337 ; L.B.5.2 175.641,76.962 175.641,70.358 L.B.4.1@180.467,65.532 ; L.F.7.2 183.134,149.225 184.658,147.701 184.658,143.002 183.896,142.24 L.F.8.1 ; R.F.8.1 L.F.8.1@181.991,142.113 ; L.B.1.2 181.356,35.179 181.356,40.259 181.61,40.513 ; L.B.2.1 181.61,40.513 ; MP2.1 195.731,132.31 203.859,132.31 R.R.8.1 ; R.R.8.1@204.295,132.032 L.R.7.2 208.836,133.858 212.598,133.858 L.R.8.1 216.027,130.429 216.789,130.429 218.694,132.334 R.R.6.1 L.R.5.2@229.235,132.334 ; L.R.5.2 231.102,133.947 234.837,133.947 L.R.6.1 237.847,130.937 239.522,130.937 240.768,132.183 R.R.4.1 L.R.3.2 253.135,134.112 256.77,134.112 L.R.4.1 260.053,130.829 262.655,130.829 264.541,132.715 R.R.2.1 L.R.1.2 274.447,134.874 277.368,134.874 L.R.2.1 ; 179.324,115.062 178.308,114.046 178.308,109.982 180.34,107.95 L.B.7.2 176.53,103.632 176.53,95.631 L.B.6.1 ; L.B.4.1@180.467,65.532 L.B.4.1 178.562,63.373 178.562,60.325 L.B.3.2 176.53,54.483 176.53,45.593 R.B.2.1 181.61,40.513
  Bottom Layer w0.8: L.B.8.1 179.197,116.586 179.197,118.745 183.769,123.317 197.866,123.317 198.628,124.079 198.628,127.635 200.279,129.286 204.264,129.286 L.R.7.2 ; R.F.2.1 182.626,187.071 182.626,183.896 L.F.3.2 ; R.F.4.1 183.134,170.815 183.134,168.021 L.F.5.2 ; R.F.6.1 183.515,154.178 183.515,150.876 L.F.7.2 ; R.F.8.1 185.039,136.652 191.389,136.652 MP2.1
pads on no net: MP1.12

## Silkscreen, mask and mechanical layers (free items; w line width, h text height)
Top Solder:
  circle w0.254: c180.848,129.286 r110
  lines w0.254: 13.335,204.47 49.081,239.43 42.17,246.658 ; 13.363,204.441 6.451,211.669 42.197,246.629 ; 24.324,229.149 31.236,221.921 ; 69.469,129.286 182.499,129.286 ; 85.993,67.138 122.703,33.192 129.698,40.337 ; 86.06,67.206 93.055,74.352 129.765,40.405 ; 93.125,183.434 128.871,218.394 121.96,225.622 ; 93.153,183.405 86.242,190.632 121.987,225.593 ; 141.006,221.677 ccw(c180.856,261.527) 220.705,221.677 ; 141.011,221.742 141.011,231.742 ; 180.848,129.286 302.641,129.286 ; 220.767,221.742 220.767,231.742 ; 233.211,216.77 269.921,182.823 276.917,189.969 ; 233.278,216.838 240.274,223.983 276.984,190.037 ; 268.416,75.14 275.327,67.912 239.507,32.879 232.624,40.078 268.444,75.111 ; 315.465,227.666 352.175,193.72 359.17,200.865 ; 315.532,227.734 322.527,234.88 359.237,200.933 ; 333.82,210.693 340.816,217.839

## Dimensions
180.848,243.586 to 182.753,9.779 on Top Solder
354.344,195.936 to 356.831,198.476 on Top Solder
352.175,193.72 to 354.661,196.26 on Top Solder
322.527,234.88 to 320.041,232.34 on Top Solder
320.358,232.664 to 317.871,230.124 on Top Solder